# Altium PCB Inductor15uH.pcbdoc
Units mm, origin at the board's own origin, x right, y up, seen from the top; angles counter-clockwise.
Board outline 38.58 x 36.96 mm, 2 copper layers (Top Layer, Bottom Layer); 1 components, 0 nets, 2 pads, 0 vias.
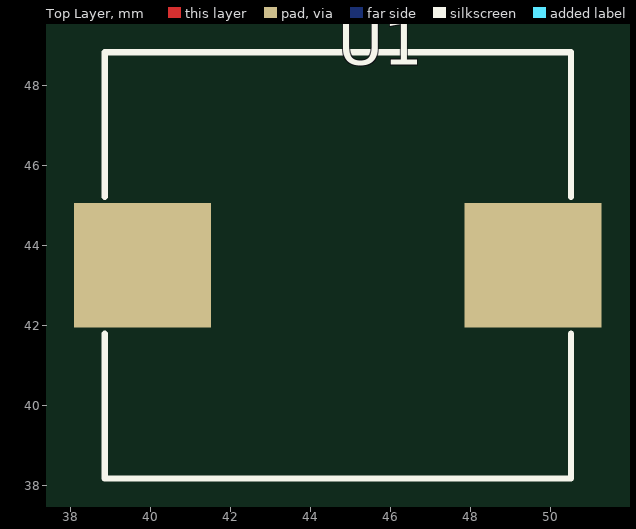
[diagram p0: Top Layer view]
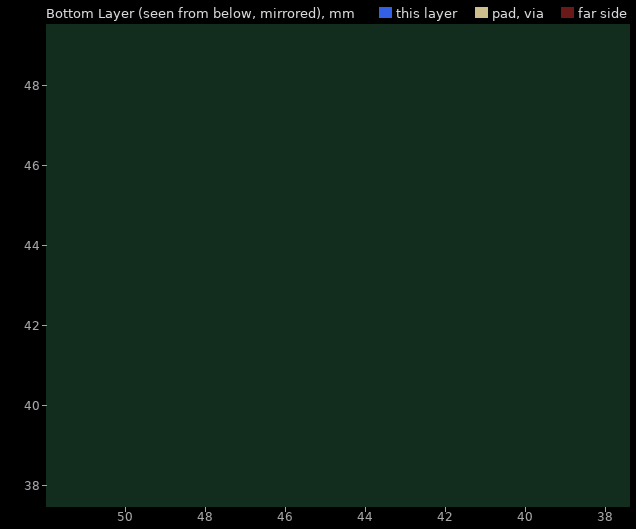
[diagram p1: Bottom Layer view, seen from below]

## Layer stack, top to bottom
Top Layer: signal copper (thickness not stored)
Dielectric: dielectric 0.32, FR-4, Dk 4.8
Bottom Layer: signal copper (thickness not stored)

## Board outline
63.98,25.4 25.4,25.4 25.4,62.362 63.98,62.362

## Components (designator, comment, footprint, x,y, rotation, side; value= is the part's Value field where it differs from the comment)
U1 "IND-SMD_L11.5-W10.5_MWSA1004" IND-SMD_L11.5-W10.5_MWSA1004 44.69,43.502 r0 top

## Footprints (in the part's own frame and the unit in brackets; to place one, negate y for a bottom-side part, rotate by r counter-clockwise, add the part's x,y. Pads: shape width x height; smd on the part's side, far side on the other; paste and mask are expansions set on the pad)
IND-SMD_L11.5-W10.5_MWSA1004 [mm]
  rect 3.424x3.12 smd: 1(4.878,0) 2(-4.878,0)
  silkscreen extent -5.83,-5.33 5.83,5.33

## Nets (pads, with @x,y where several pads share a name; then routed paths per layer and width w, separated by ;. In a path a pad name is that pad's centre, name@x,y a point inside that pad or via, vN(x,y) a via of type N, cw(c..) or ccw(c..) an arc to the next point about the centre after c; other vN are vias at no path point)
pads on no net: U1.1 U1.2

## Silkscreen, mask and mechanical layers (free items; w line width, h text height)
Document:
  lines w0.003: 44.69,43.881 44.69,43.881